# Altium PCB RavAGE-0.1-alpha.PcbDoc
Units mm, origin at the board's own origin, x right, y up, seen from the top; angles counter-clockwise.
Board outline 100 x 160 mm, 4 copper layers (Top Layer, Mid-Layer 1, Mid-Layer 2, Bottom Layer); 42 components, 3 nets, 311 pads, 54 vias.
Unrouted connection lines stored in the file: 11.
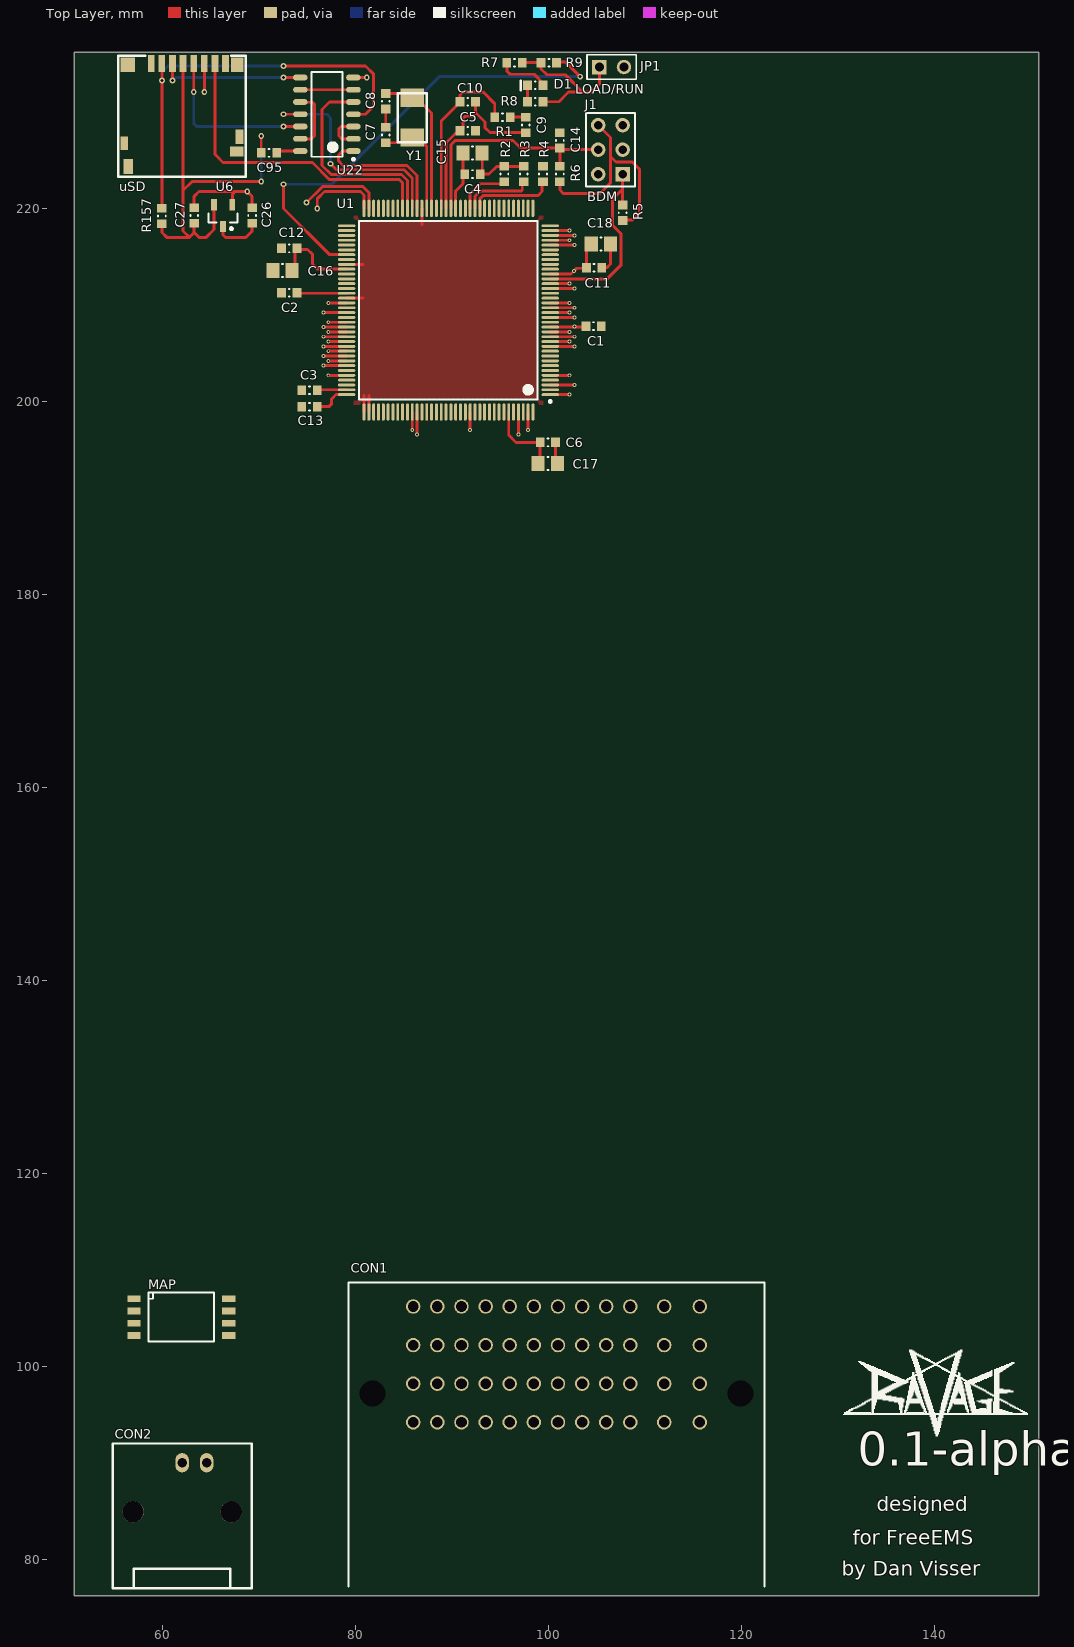
[diagram p0: Top Layer view]
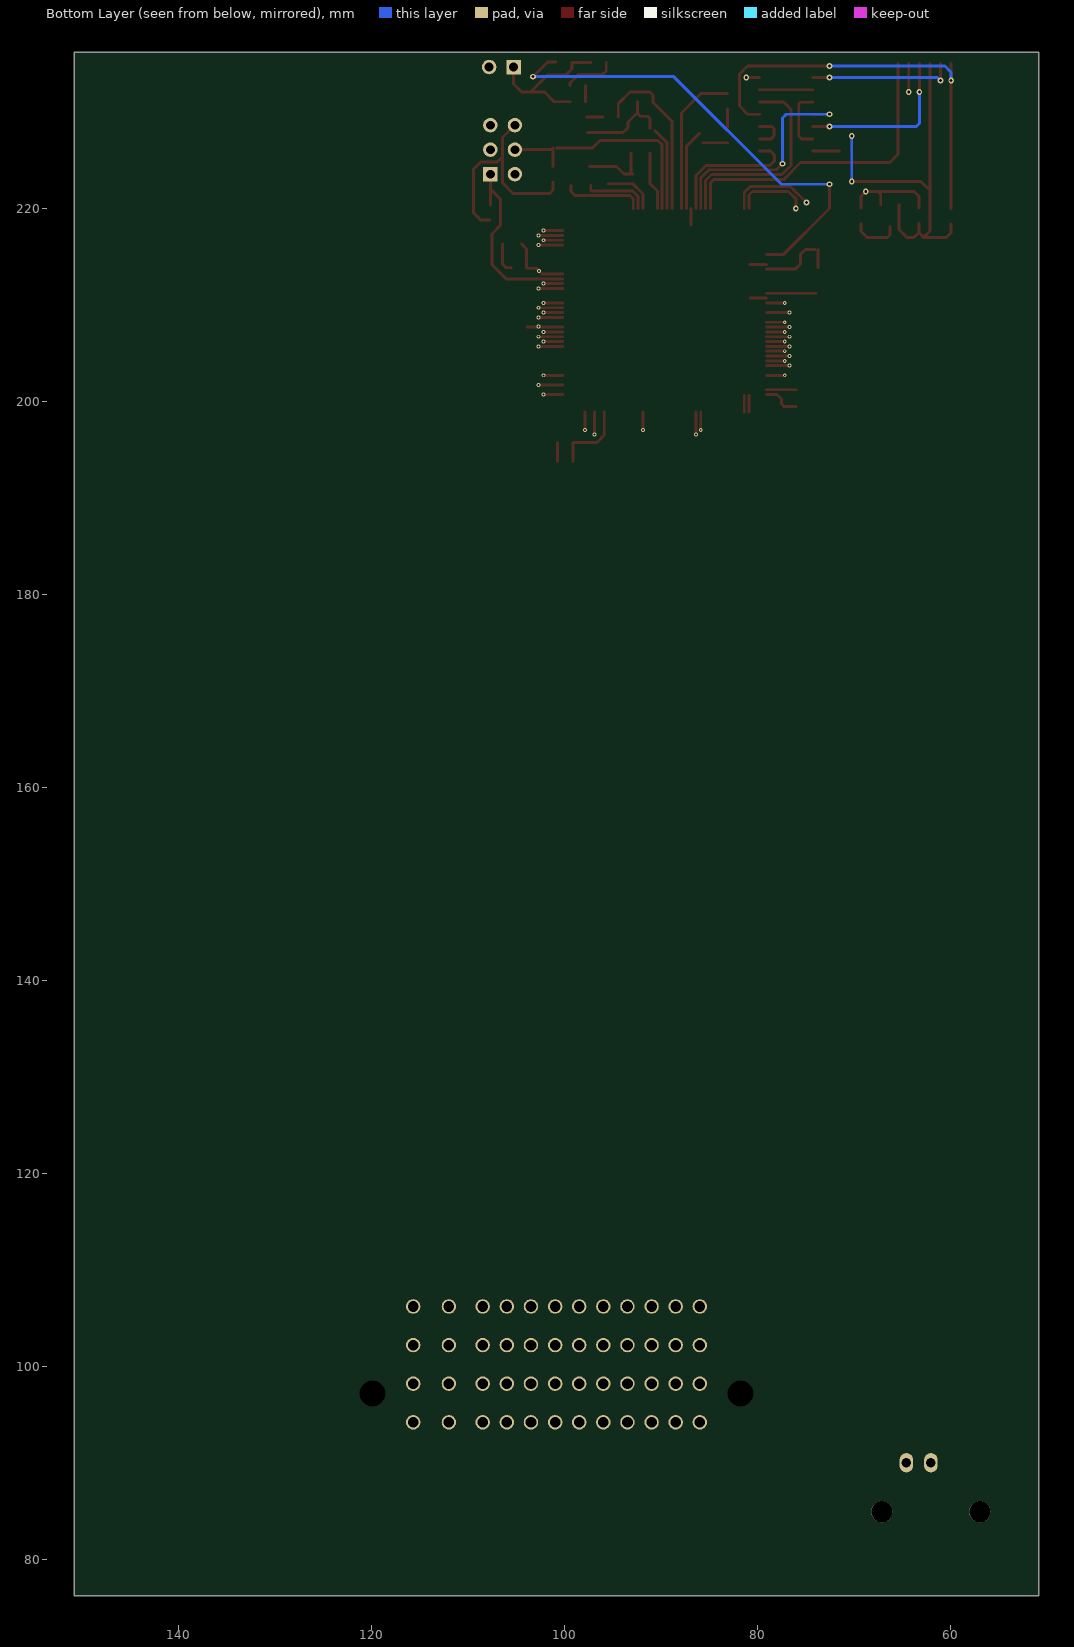
[diagram p1: Bottom Layer view, seen from below]

## Layer stack, top to bottom
Top Layer: signal copper 0.0356
Dielectric: dielectric 0.32, FR-4, Dk 4.8
Mid-Layer 1: signal copper 0.0356
Dielectric: dielectric 0.32, FR-4, Dk 4.8
Mid-Layer 2: signal copper 0.0356
Dielectric: dielectric 0.32, FR-4, Dk 4.8
Bottom Layer: signal copper 0.0356

## Board outline
50.8,76.2 150.8,76.2 150.8,236.2 50.8,236.2

## Design rules (kind name [scope] priority, off if disabled: settings)
Clearance [All] p1: gap=0.5
PolygonConnect [All] p1: connectstyle=Relief reliefconductorwidth=0.254 reliefentries=4 polygonreliefangle="90 Angle" airgapwidth=0.254
RoutingVias [All] p1: holewidth=0.3 width=0.6 viastyle="Through Hole" minholewidth=0.711 minwidth=1.27 maxholewidth=0.711 maxwidth=1.27
SilkscreenOverComponentPads [All] p1: minsilkscreentomaskgap=0.254
SolderMaskExpansion [All] p1: expansion=0.102
Width [All] p1: maxlimit=2 minlimit=0.3 preferedwidth=0.3 minimp=50.000000 maximp=50.000000 favimp=50.000000
27 further rules are at their usual default settings.

## Components (designator, comment, footprint, x,y, rotation, side; value= is the part's Value field where it differs from the comment)
C1 "" CAP0603 104.65,207.8 r0 top
C2 "" CAP0603 73.1,211.25 r0 top
C3 "" CAP0603 75.2,201.15 r180 top
C4 "" CAP0603 92.1,223.55 r0 top
C5 "" CAP0603 91.6,228.05 r0 top
C6 "" CAP0603 99.9,195.75 r180 top
C7 "" CAP0603 83.1,227.6 r270 top
C8 "" CAP0603 83.1,231.1 r270 top
C9 "" CAP0603 97.6,228.65 r270 top
C10 "" CAP0603 91.6,231.05 r0 top
C11 "" CAP0603 104.7,213.85 r0 top
C12 "" CAP0603 73.1,215.85 r180 top
C13 "" CAP0603 75.2,199.45 r0 top
C14 "" CAP0603 101.15,227.05 r90 top
C15 "" CAP0805 92.1,225.75 r0 top
C16 "" CAP0805 72.4,213.55 r180 top
C17 "" CAP0805 99.9,193.55 r180 top
C18 "" CAP0805 105.4,216.3 r0 top
C26 "" CAP0603 69.25,219.25 r270 top
C27 "" CAP0603 63.25,219.25 r270 top
C95 "" CAP0603 71,225.75 r180 top
CON1 "Comment" MOLEX0366380002 119.85,97.2 r0 top locked
CON2 "Comment" "BNC MULTICOMP" 62,90 r180 top
D1 "" DIODE0603 98.6,232.75 r0 top
J1 "" HDR2X3 107.65,223.55 r90 top
JP1 "" HDR1X2 105.25,234.65 r0 top
MAP "Comment" SSOP8 57,107 r0 top
R1 "" RES0603 95.2,229.45 r0 top
R2 "" RES0603 95.4,223.55 r270 top
R3 "" RES0603 97.4,223.55 r270 top
R4 "" RES0603 99.4,223.55 r270 top
R5 "" RES0603 107.65,219.55 r270 top
R6 "" RES0603 101.15,223.55 r270 top
R7 "" RES0603 96.45,235.1 r180 top
R8 "" RES0603 98.6,231.05 r180 top
R9 "" RES0603 100,235.1 r180 top
R157 "" RES0603 59.9,219.2 r90 top
U1 "" LQFP144 89.6,209.45 r180 top locked
U6 "Comment" SOT23_N 66.25,219.25 r270 top
U22 "Comment" SOIC127P600-14AN 77,229.75 r180 top
uSD "Comment" MicroSD 66.5,235 r180 top
Y1 "" AMB3 85.85,231.45 r270 top

## Footprints (in the part's own frame and the unit in brackets; to place one, negate y for a bottom-side part, rotate by r counter-clockwise, add the part's x,y. Pads: shape width x height; smd on the part's side, far side on the other; paste and mask are expansions set on the pad)
AMB3 [mm]
  rect 1.9x2.4 smd: 1(0,0) 2(4.1,0)
  silkscreen extent -0.5,-1.51 4.6,1.51
"BNC MULTICOMP" [mm]
  oval 1.4x2 hole 1: 1(0,0) 2(-2.54,0)
  round 2.2 hole 2.2: X(-5.08,5.08) X(5.08,5.08)
  silkscreen extent -7.2,-2 7.2,13
CAP0603 [mm] "Chip Capacitor, Body 1.6x0.8mm, Height 1.0mm, IPC Medium Density"
  rect 0.9x1 smd: 1(-0.8,0) 2(0.8,0)
  silkscreen extent -0.05,-0.4 0.05,0.4, body extent -0.87,-0.48 0.88,0.47, height 1
CAP0805 [mm] "Chip Capacitor, Body 2.0x1.2mm, Height 0.75mm, IPC Low Density"
  rect 1.35x1.55 smd: 1(-1,0) 2(1,0)
  silkscreen extent -0.05,-0.68 0.05,0.67, body extent -1.1,-0.72 1.1,0.72, height 0.75
DIODE0603 [mm] "Chip Diode, Body 1.6x0.8mm, IPC Medium Density"
  rect 0.9x1 smd: 1(-0.8,0) 2(0.8,0)
  silkscreen extent -1.5,-0.5 0.05,0.5, body extent -0.85,-0.47 0.85,0.47, height 0.6
HDR1X2 [mm] "Connector; Header; 2 Position"
  rect 1.5x1.5 hole 0.9: 1(0,0)
  round 1.5 hole 0.9: 2(2.54,0)
  silkscreen extent -1.27,-1.27 3.81,1.27
HDR2X3 [mm] "Connector; Header; 3x2 Position"
  rect 1.5x1.5 hole 0.9: 1(0,0)
  round 1.5 hole 0.9: 2(0,2.54) 3(2.54,0) 4(2.54,2.54) 5(5.08,0) 6(5.08,2.54)
  silkscreen extent -1.27,-1.27 6.35,3.81
LQFP144 [mm] "Thin QFP, 144-Leads, Body 20x20mm, Pitch 0.5mm, IPC Medium Density"
  oval 1.8x0.3 smd: 1(-10.55,8.75) 2(-10.55,8.25) 3(-10.55,7.75) 4(-10.55,7.25) 5(-10.55,6.75) 6(-10.55,6.25) 7(-10.55,5.75) 8(-10.55,5.25) 9(-10.55,4.75) 10(-10.55,4.25) 11(-10.55,3.75) 12(-10.55,3.25) 13(-10.55,2.75) 14(-10.55,2.25) 15(-10.55,1.75) 16(-10.55,1.25) 17(-10.55,0.75) 18(-10.55,0.25) 19(-10.55,-0.25) 20(-10.55,-0.75) 21(-10.55,-1.25) 22(-10.55,-1.75) 23(-10.55,-2.25) 24(-10.55,-2.75) 25(-10.55,-3.25) 26(-10.55,-3.75) 27(-10.55,-4.25) 28(-10.55,-4.75) 29(-10.55,-5.25) 30(-10.55,-5.75) 31(-10.55,-6.25) 32(-10.55,-6.75) 33(-10.55,-7.25) 34(-10.55,-7.75) 35(-10.55,-8.25) 36(-10.55,-8.75) 73(10.55,-8.75) 74(10.55,-8.25) 75(10.55,-7.75) 76(10.55,-7.25) 77(10.55,-6.75) 78(10.55,-6.25) 79(10.55,-5.75) 80(10.55,-5.25) 81(10.55,-4.75) 82(10.55,-4.25) 83(10.55,-3.75) 84(10.55,-3.25) 85(10.55,-2.75) 86(10.55,-2.25) 87(10.55,-1.75) 88(10.55,-1.25) 89(10.55,-0.75) 90(10.55,-0.25) 91(10.55,0.25) 92(10.55,0.75) 93(10.55,1.25) 94(10.55,1.75) 95(10.55,2.25) 96(10.55,2.75) 97(10.55,3.25) 98(10.55,3.75) 99(10.55,4.25) 100(10.55,4.75) 101(10.55,5.25) 102(10.55,5.75) 103(10.55,6.25) 104(10.55,6.75) 105(10.55,7.25) 106(10.55,7.75) 107(10.55,8.25) 108(10.55,8.75)
  oval 0.3x1.8 smd: 37(-8.75,-10.55) 38(-8.25,-10.55) 39(-7.75,-10.55) 40(-7.25,-10.55) 41(-6.75,-10.55) 42(-6.25,-10.55) 43(-5.75,-10.55) 44(-5.25,-10.55) 45(-4.75,-10.55) 46(-4.25,-10.55) 47(-3.75,-10.55) 48(-3.25,-10.55) 49(-2.75,-10.55) 50(-2.25,-10.55) 51(-1.75,-10.55) 52(-1.25,-10.55) 53(-0.75,-10.55) 54(-0.25,-10.55) 55(0.25,-10.55) 56(0.75,-10.55) 57(1.25,-10.55) 58(1.75,-10.55) 59(2.25,-10.55) 60(2.75,-10.55) 61(3.25,-10.55) 62(3.75,-10.55) 63(4.25,-10.55) 64(4.75,-10.55) 65(5.25,-10.55) 66(5.75,-10.55) 67(6.25,-10.55) 68(6.75,-10.55) 69(7.25,-10.55) 70(7.75,-10.55) 71(8.25,-10.55) 72(8.75,-10.55) 109(8.75,10.55) 110(8.25,10.55) 111(7.75,10.55) 112(7.25,10.55) 113(6.75,10.55) 114(6.25,10.55) 115(5.75,10.55) 116(5.25,10.55) 117(4.75,10.55) 118(4.25,10.55) 119(3.75,10.55) 120(3.25,10.55) 121(2.75,10.55) 122(2.25,10.55) 123(1.75,10.55) 124(1.25,10.55) 125(0.75,10.55) 126(0.25,10.55) 127(-0.25,10.55) 128(-0.75,10.55) 129(-1.25,10.55) 130(-1.75,10.55) 131(-2.25,10.55) 132(-2.75,10.55) 133(-3.25,10.55) 134(-3.75,10.55) 135(-4.25,10.55) 136(-4.75,10.55) 137(-5.25,10.55) 138(-5.75,10.55) 139(-6.25,10.55) 140(-6.75,10.55) 141(-7.25,10.55) 142(-7.75,10.55) 143(-8.25,10.55) 144(-8.75,10.55)
  silkscreen extent -10.68,-9.25 9.25,9.57, body extent -10,-10 10,10, height 1.6
MicroSD [mm]
  rect 0.7x1.75 smd: 1(7.7,0) 2(6.6,0) 3(5.5,0) 4(4.4,0) 5(3.3,0) 6(2.2,0) 7(1.1,0) 8(0,0)
  rect 0.8x1.5 smd: X(-1.45,7.6)
  rect 1.3x1.5 smd: X(-1.2,0.125)
  rect 1.4x1 smd: X(-1.15,9.1)
  rect 1x1.55 smd: X(10.1,10.675)
  rect 1.5x1.5 smd: X(10.15,0.125)
  rect 0.8x1.4 smd: X(10.5,8.25)
  silkscreen extent -2.1,-0.8 11.1,11.7
MOLEX0366380002 [mm]
  round 1.5 hole 1.1: A1(-33.9,9) A2(-33.9,5) A3(-33.9,1) A4(-33.9,-3) B1(-31.4,9) B2(-31.4,5) B3(-31.4,1) B4(-31.4,-3) C1(-28.9,9) C2(-28.9,5) C3(-28.9,1) C4(-28.9,-3) D1(-26.4,9) D2(-26.4,5) D3(-26.4,1) D4(-26.4,-3) E1(-23.9,9) E2(-23.9,5) E3(-23.9,1) E4(-23.9,-3) F1(-21.4,9) F2(-21.4,5) F3(-21.4,1) F4(-21.4,-3) G1(-18.9,9) G2(-18.9,5) G3(-18.9,1) G4(-18.9,-3) H1(-16.4,9) H2(-16.4,5) H3(-16.4,1) H4(-16.4,-3) J1(-13.9,9) J2(-13.9,5) J3(-13.9,1) J4(-13.9,-3) K1(-11.4,9) K2(-11.4,5) K3(-11.4,1) K4(-11.4,-3) L1(-7.9,9) L2(-7.9,5) L3(-7.9,1) L4(-7.9,-3) M1(-4.2,9) M2(-4.2,5) M3(-4.2,1) M4(-4.2,-3)
  round 2 hole 2.7: X(-38.1,0) X(0,0)
  silkscreen extent -40.6,-20 2.5,11.5, body extent -48.28,-44.27 10.22,11.95, height 28.73
RES0603 [mm] "Chip Resistor, Body 1.6x0.8mm, IPC Medium Density"
  rect 0.9x1 smd: 1(-0.8,0) 2(0.8,0)
  silkscreen extent -0.05,-0.4 0.05,0.4, body extent -0.85,-0.47 0.85,0.47, height 0.6
SOIC127P600-14AN [mm] "SOIC, 14-Leads, Body 8.6x3.9mm, Pitch 1.27mm, IPC Medium Density"
  oval 1.5x0.6 smd: 1(-2.75,3.81) 2(-2.75,2.54) 3(-2.75,1.27) 4(-2.75,0) 5(-2.75,-1.27) 6(-2.75,-2.54) 7(-2.75,-3.81) 8(2.75,-3.81) 9(2.75,-2.54) 10(2.75,-1.27) 11(2.75,0) 12(2.75,1.27) 13(2.75,2.54) 14(2.75,3.81)
  silkscreen extent -2.88,-4.4 1.6,4.78, body extent -2,-4.38 2,4.38, height 1.73
SOT23_N [mm] "SOT23, 3-Leads, Body 2.9x1.3mm, Pitch 0.95mm, Lead Span 2.3mm - Reverse Pinning, IPC Medium Density"
  rect 1.15x0.6 smd: 1(1.125,0) 2(-1.125,-0.95) 3(-1.125,0.95)
  silkscreen extent -0.2,-1.5 1.47,1.5, body extent -0.7,-1.5 0.7,1.5, height 1.1
SSOP8 [mm] "Super Small Outline Package, 8-pin"
  rect 1.35x0.69 smd: 1(0,0) 2(0,-1.27) 3(0,-2.54) 4(0,-3.81) 5(9.83,-3.81) 6(9.83,-2.54) 7(9.83,-1.27) 8(9.83,0)
  silkscreen extent 1.51,-4.44 8.32,0.64

## Via types
v1: diameter 0.4, hole 0.2, Top Layer to Bottom Layer, 37 vias
v2: diameter 0.6, hole 0.3, Top Layer to Bottom Layer, 17 vias

## Nets (pads, with @x,y where several pads share a name; then routed paths per layer and width w, separated by ;. In a path a pad name is that pad's centre, name@x,y a point inside that pad or via, vN(x,y) a via of type N, cw(c..) or ccw(c..) an arc to the next point about the centre after c; other vN are vias at no path point)
"+5V MICRO": C3.1 C12.1 C16.1 C26.2 U1.82 U1.107 U6.1 | length 16.5
  Top Layer w0.3: U6.1 66.25,217.25 66.5,217 68.619,217 69.25,217.631 C26.2 ; C16.1@73.7,213.85 C12.1@73.7,215.75 ; C12.1@74,215.75 75,215.75 75.5,215.25 75.5,214.25 76.05,213.7 U1.82 ; C3.1@76,201.2 U1.107
"+5V SW": C13.2 U1.108 | length 3.9
  Top Layer w0.3: C13.2 77.2,199.45 77.5,199.75 77.5,200.25 77.95,200.7 U1.108
GND: C2.1 C3.2 C7.1 C8.2 C12.2 C13.1 C16.2 C26.1 C27.1 JP1.2 U1.60 U1.81 U1.88 U1.109 U1.110 U6.3 | length 20.7
  Top Layer w0.3: C27.1 63.25,221.25 63.75,221.75 67.5,221.75 ; U6.3 67.2,221.45 67.5,221.75 ; C26.1 69.25,221.25 v2(68.75,221.75) 67.5,221.75 ; U1.88 80.75,210.7 ; U1.81 80.75,214.2 ; U1.109 80.85,200.6 ; U1.110 81.35,200.6 ; C7.1 C8.2 ; 86.85,218.3 U1.60
  other v2: 64.3,232.05
pads on no net: C1.1 C1.2 C2.2 C4.1 C4.2 C5.1 C5.2 C6.1 C6.2 C7.2 C8.1 C9.1 C9.2 C10.1 C10.2 C11.1 C11.2 C14.1 C14.2 C15.1 C15.2 C17.1 C17.2 C18.1 C18.2 C27.2 C95.1 C95.2 CON1.A1 CON1.A2 CON1.A3 CON1.A4 CON1.B1 CON1.B2 CON1.B3 CON1.B4 CON1.C1 CON1.C2 CON1.C3 CON1.C4 CON1.D1 CON1.D2 CON1.D3 CON1.D4 CON1.E1 CON1.E2 CON1.E3 CON1.E4 CON1.F1 CON1.F2 CON1.F3 CON1.F4 CON1.G1 CON1.G2 CON1.G3 CON1.G4 CON1.H1 CON1.H2 CON1.H3 CON1.H4 CON1.J1 CON1.J2 CON1.J3 CON1.J4 CON1.K1 CON1.K2 CON1.K3 CON1.K4 CON1.L1 CON1.L2 CON1.L3 CON1.L4 CON1.M1 CON1.M2 CON1.M3 CON1.M4 CON1.X CON2.1 CON2.2 CON2.X D1.1 D1.2 J1.1 J1.2 J1.3 J1.4 J1.5 J1.6 JP1.1 MAP.1 MAP.2 MAP.3 MAP.4 MAP.5 MAP.6 MAP.7 MAP.8 R1.1 R1.2 R2.1 R2.2 R3.1 R3.2 R4.1 R4.2 R5.1 R5.2 R6.1 R6.2 R7.1 R7.2 R8.1 R8.2 R9.1 R9.2 R157.1 R157.2 U1.1 U1.2 U1.3 U1.4 U1.5 U1.6 U1.7 U1.8 U1.9 U1.10 U1.11 U1.12 U1.13 U1.14 U1.15 U1.16 U1.17 U1.18 U1.19 U1.20 U1.21 U1.22 U1.23 U1.24 U1.25 U1.26 U1.27 U1.28 U1.29 U1.30 U1.31 U1.32 U1.33 U1.34 U1.35 U1.36 U1.37 U1.38 U1.39 U1.40 U1.41 U1.42 U1.43 U1.44 U1.45 U1.46 U1.47 U1.48 U1.49 U1.50 U1.51 U1.52 U1.53 U1.54 U1.55 U1.56 U1.57 U1.58 U1.59 U1.61 U1.62 U1.63 U1.64 U1.65 U1.66 U1.67 U1.68 U1.69 U1.70 U1.71 U1.72 U1.73 U1.74 U1.75 U1.76 U1.77 U1.78 U1.79 U1.80 U1.83 U1.84 U1.85 U1.86 U1.87 U1.89 U1.90 U1.91 U1.92 U1.93 U1.94 U1.95 U1.96 U1.97 U1.98 U1.99 U1.100 U1.101 U1.102 U1.103 U1.104 U1.105 U1.106 U1.111 U1.112 U1.113 U1.114 U1.115 U1.116 U1.117 U1.118 U1.119 U1.120 U1.121 U1.122 U1.123 U1.124 U1.125 U1.126 U1.127 U1.128 U1.129 U1.130 U1.131 U1.132 U1.133 U1.134 U1.135 U1.136 U1.137 U1.138 U1.139 U1.140 U1.141 U1.142 U1.143 U1.144 U6.2 U22.1 U22.2 U22.3 U22.4 U22.5 U22.6 U22.7 U22.8 U22.9 U22.10 U22.11 U22.12 U22.13 U22.14 uSD.1 uSD.2 uSD.3 uSD.4 uSD.5 uSD.6 uSD.7 uSD.8 uSD.X Y1.1 Y1.2
copper on no net: | length 596.1
  Top Layer w0.3: 59.9,218.4 59.9,217.5 60.4,217 62.75,217 ; 59.9,220 v2(59.9,233.25) 59.9,235 ; v2(61,233.25) 61,235 ; 62.1,221.85 63.05,222.8 v2(70.2,222.8) ; 62.1,235 62.1,217.65 62.75,217 ; v2(63.2,232.05) 63.2,235 ; 63.25,218.45 63.25,217.5 ; 64.3,232.05 64.3,235 ; 65.3,220.375 65.3,217.8 64.5,217 63.75,217 63.25,217.5 ; 65.4,235 65.4,233.25 65.4,225.6 65.5,225.5 66.25,224.75 75.5,224.75 77.25,223 84.5,223 84.85,222.65 84.85,220 ; 70.2,225.75 v2(70.2,227.5) ; 71.5,225.94 74.25,225.94 ; v2(72.5,222.5) 72.5,220 77.3,215.2 79.05,215.2 ; v2(72.5,228.48) 74.25,228.48 ; v2(72.5,229.75) 74.25,229.75 ; v2(72.5,233.56) 74.25,233.56 ; v2(72.5,234.75) 81,234.75 81.85,233.9 81.85,230.6 81,229.75 79.75,229.75 ; 73.9,211.2 79.05,211.2 ; 74.25,227.21 75.41,227.21 75.7,227.5 75.7,230.5 75.7,230.8 75.5,231 74.27,231 74.25,231.02 ; 74.25,232.29 79.75,232.29 ; v2(74.896,220.604) 76.543,222.25 80.75,222.25 81.35,221.65 81.35,220 ; v2(76,220) 76,221 76.75,221.75 80.5,221.75 80.85,221.4 80.85,220 ; v1(76.65,203.7) 79.05,203.7 ; v1(76.65,204.7) 79.05,204.7 ; v1(76.65,205.7) 79.05,205.7 ; v1(76.65,206.7) 79.05,206.7 ; v1(76.65,207.7) 79.05,207.7 ; v1(76.65,209.2) 79.05,209.2 ; v1(77.15,202.7) 79.05,202.7 ; v1(77.15,204.2) 79.05,204.2 ; v1(77.15,205.2) 79.05,205.2 ; v1(77.15,206.2) 79.05,206.2 ; v1(77.15,207.2) 79.05,207.2 ; v1(77.15,208.2) 79.05,208.2 ; v1(77.15,210.2) 79.05,210.2 ; v2(77.375,224.625) 78,224 85,224 85.85,223.15 85.85,220 ; 79.75,225.94 78.64,225.94 78.2,225.5 78.2,224.936 78.686,224.45 85.3,224.45 86.35,223.4 86.35,220 ; 79.75,227.21 78.54,227.21 78.25,227.5 78.25,228 78.25,228.25 78.48,228.48 79.75,228.48 ; 79.75,231.02 77.27,231.02 77,230.75 76.5,230.25 76.5,224.457 77.457,223.5 84.75,223.5 85.35,222.9 85.35,220 ; 79.75,233.56 v2(81.135,233.56) ; 83.1,226.8 85.6,226.8 ; 83.1,231.9 85.85,231.9 ; v1(85.85,197.05) 85.85,198.9 ; 86,227.75 87.35,226.4 87.35,220 ; 86,231.75 87.85,229.9 87.85,220 ; v1(86.35,196.55) 86.35,198.9 ; 88.85,220 88.85,229.05 89.6,229.8 90.8,231 ; 89.35,220 89.35,226.8 89.85,227.3 90.6,228.05 ; 89.85,220 89.85,226.6 90.3,227.05 96.3,227.05 97.1,226.25 100.8,226.25 ; 90.35,220 90.35,221.8 91.1,222.55 91.1,225.75 ; 90.8,231.05 90.8,231.75 91.1,232.05 93.2,232.05 94.4,230.85 94.4,229.45 ; 91.1,228.3 91.1,229.3 91.35,229.55 92.1,229.55 92.4,229.85 92.4,231.05 ; v1(91.85,197.05) 91.85,198.9 ; 91.85,220 91.85,221.5 92.9,222.55 94.7,222.55 95.4,222.55 ; 92.35,220 92.35,221.25 92.9,221.8 97.15,221.8 97.25,221.9 97.25,222.4 ; 92.45,229.9 93.4,228.95 93.4,228.35 93.9,227.85 97.6,227.85 ; 92.85,220 92.85,221 93.2,221.35 98.9,221.35 99.3,221.75 99.3,222.35 ; 92.9,223.55 93.8,223.55 94.6,224.35 95.4,224.35 97.4,224.35 ; 93.1,223.75 93.1,225.75 ; 95.65,235.1 95.65,234.25 96,233.9 96.5,233.9 98.15,233.9 98.5,233.9 99.4,233 99.4,232.75 99.4,233.019 ; 95.85,198.9 95.85,196.5 96.5,195.85 96.6,195.75 99.1,195.75 99.1,193.75 ; 96,229.45 97.7,229.45 ; v1(96.85,196.55) 96.85,198.9 ; 97.25,235.1 99.2,235.1 99.2,234.45 99.8,233.85 101.7,233.85 103.5,232.05 ; 97.8,231.05 97.8,232.75 ; v1(97.85,197.05) 97.85,198.9 ; 99.4,231.05 101.05,231.05 102.05,232.05 104.4,232.05 105.25,232.9 105.25,234.65 ; 100.15,200.7 v1(102.15,200.7) ; 100.15,201.7 v1(102.65,201.7) ; 100.15,202.7 v1(102.15,202.7) ; 100.15,205.7 v1(102.65,205.7) ; 100.15,206.2 v1(102.15,206.2) ; 100.15,206.7 v1(102.65,206.7) ; 100.15,207.2 v1(102.15,207.2) ; 100.15,207.7 103.85,207.7 ; 100.15,208.7 v1(102.65,208.7) ; 100.15,209.2 v1(102.15,209.2) ; 100.15,209.7 v1(102.65,209.7) ; 100.15,210.2 v1(102.15,210.2) ; 100.15,211.7 v1(102.65,211.7) ; 100.15,212.2 v1(102.15,212.2) ; 100.15,212.7 106.05,212.7 107.5,214.15 107.5,217.35 106.6,218.25 106.6,220.95 107.625,221.975 ; 100.15,213.2 102.3,213.2 102.9,213.8 103.85,213.8 ; 100.15,216.2 v1(102.65,216.2) ; 100.15,216.7 v1(102.15,216.7) ; 100.15,217.2 v1(102.65,217.2) ; 100.15,217.7 v1(102.15,217.7) ; 100.7,193.75 100.7,195.75 ; 100.85,235.15 101.75,235.15 v2(103.25,233.65) ; 101.15,222.75 101.15,221.9 101.5,221.55 105.3,221.55 106.4,222.65 106.4,225.35 ; 101.15,224.35 101.15,226.25 ; 101.15,226.09 105.11,226.09 ; 103.9,213.85 103.9,215.8 104.4,216.3 ; 105.11,228.63 106.4,227.34 106.4,225.35 ; 105.5,213.85 106,213.85 106.4,214.25 106.4,216.3 ; 107.65,220.35 107.65,223.55 ; 107.7,218.8 108.65,218.8 109.4,219.55 109.4,224.05 108.65,224.8 106.95,224.8 106.4,225.35 ; 62.75,217 63.25,217.5
  Bottom Layer w0.3: v2(59.9,233.25) 59.9,234.1 60,234.2 60.55,234.75 v2(72.5,234.75) ; v2(61,233.25) 61.31,233.56 61.75,233.56 v2(72.5,233.56) ; v2(63.2,232.05) 63.2,228.8 63.52,228.48 v2(72.5,228.48) ; v2(70.2,222.8) v2(70.2,227.5) ; v2(72.5,222.5) 77.5,222.5 88.65,233.65 v2(103.25,233.65) ; v2(72.5,229.75) 77,229.75 77.375,229.375 v2(77.375,224.625) ; v1(102.15,207.2) v1@102.2,207.25 ; v1(102.15,210.2) v1@102.2,210.25 ; v1(102.15,212.2) v1@102.2,212.25 ; v1(102.15,217.7) v1@102.2,217.75
  other v1: 102.65,207.75 102.6,213.5

## Polygon pours and split planes (outlines as drawn)
GND on Top Layer "CPU GND" (solid, pour order 8): 99.4,219.25 79.8,219.25 79.8,199.65 99.4,199.65

## Silkscreen, mask and mechanical layers (free items; w line width, h text height)
Top Overlay:
  drawing of 540 lines, arcs and shapes, not listed
  text "LOAD/RUN" at 102.75,231.9 h1
  text "BDM" at 104,220.75 h1
  text "0.1-alpha" at 132,88.5 h6
  text "designed" at 134,85 h1.52
  text "for FreeEMS" at 131.5,81.5 h1.52
  text "by Dan Visser" at 130.336,78.318 h1.52
Mechanical 1:
  the board outline again, w0.3

## Dimensions
50.8,76.2 to 50.8,236.2 on Mechanical 1
50.8,76.2 to 150.8,76.2 on Mechanical 1

## Text inside footprints (layer, text, board x,y; h text height)
CON1: Mechanical 13 "MIN PCB EDGE" at 109.35,73.7 h1.5 r180